# Altium PCB PCB_relay.PcbDoc
Units mm, origin at the board's own origin, x right, y up, seen from the top; angles counter-clockwise.
Board outline 35.05 x 27.18 mm, 2 copper layers (Top Layer, Bottom Layer); 11 components, 16 nets, 53 pads, 22 vias.
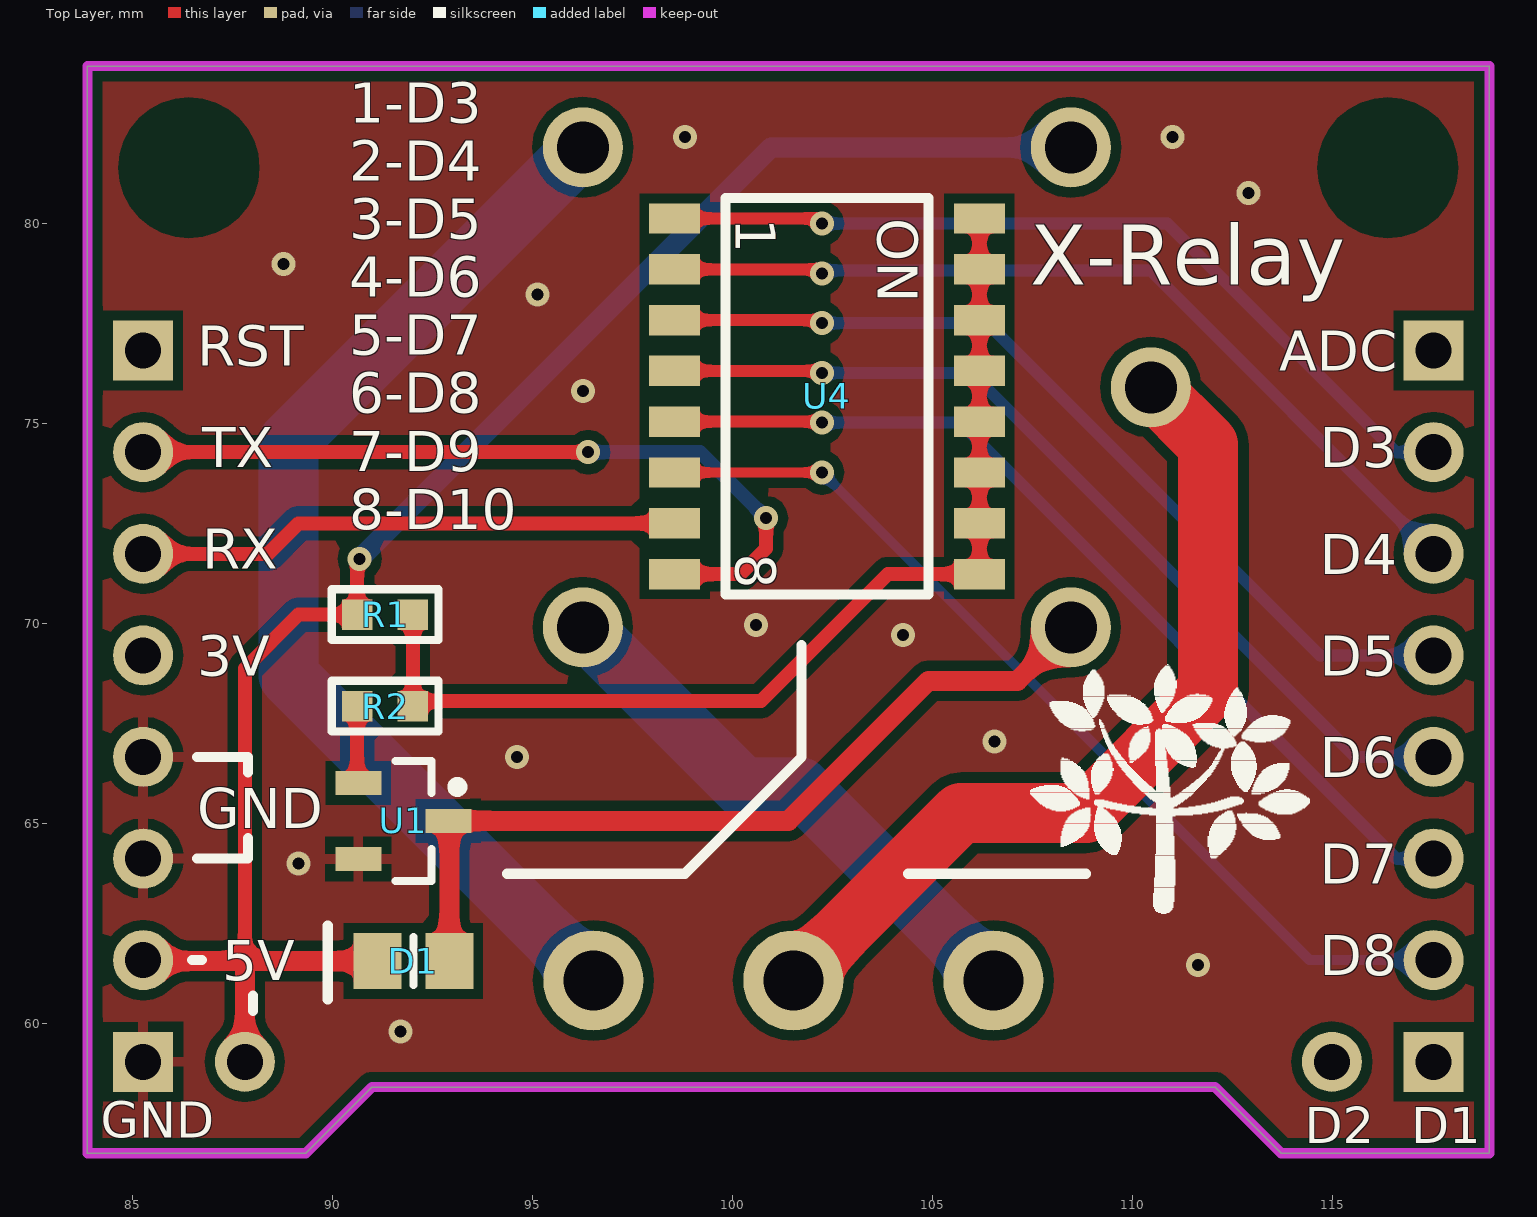
[diagram p0: Top Layer view]
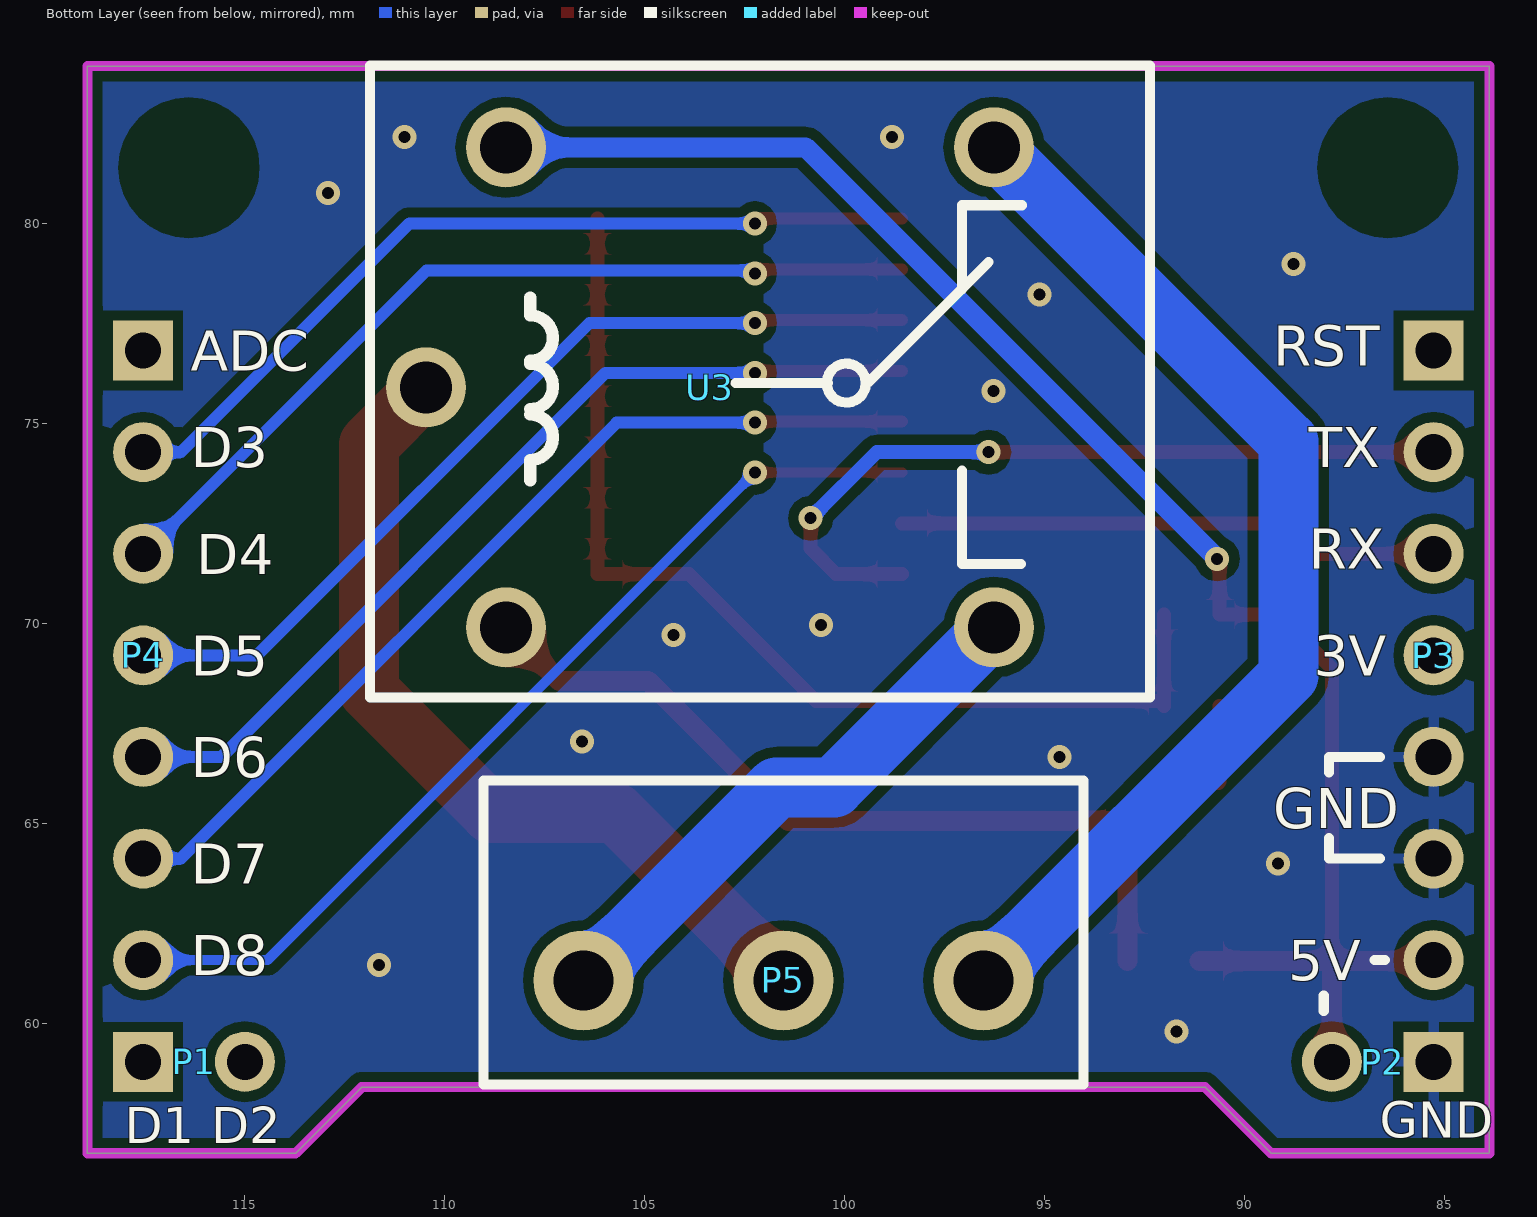
[diagram p1: Bottom Layer view, seen from below]

## Layer stack, top to bottom
Top Solder: solder mask 0.0102, Solder Resist, Dk 3.5
Top Layer: signal copper 0.0356
Dielectric 1: dielectric 0.32, FR-4, Dk 4.8
Bottom Layer: signal copper 0.0356
Bottom Solder: solder mask 0.0102, Solder Resist, Dk 3.5

## Board outline
83.871,56.769 83.871,83.947 118.923,83.947 118.923,56.769 113.716,56.769 112.065,58.42 90.983,58.42 89.332,56.769

## Design rules (kind name [scope] priority, off if disabled: settings)
Clearance [All] p1: gap=0.254
PolygonConnect PolygonConnect_VIA [IsVia] p1: connectstyle=Direct reliefconductorwidth=0.254 reliefentries=4 polygonreliefangle="90 Angle" airgapwidth=0.254
PolygonConnect [All] p2: connectstyle=Relief reliefconductorwidth=0.254 reliefentries=4 polygonreliefangle="90 Angle" airgapwidth=0.254
RoutingVias [All] p1: holewidth=0.711 width=1.27 viastyle="Through Hole" minholewidth=0.711 minwidth=1.27 maxholewidth=0.711 maxwidth=1.27
SolderMaskExpansion [All] p1: expansion=0.102
Width [All] p1: maxlimit=5 minlimit=0.254 preferedwidth=0.254
30 further rules are at their usual default settings.

## Components (designator, comment, footprint, x,y, rotation, side; value= is the part's Value field where it differs from the comment)
D1 "1N4148" 1N4148 92.837,61.595 r180 top
P1 "Header 2" HDR1X2 117.526,59.055 r180 bottom
P2 "Header 2" HDR1X2 85.268,59.055 r0 bottom
P3 "Header 7" HDR1X7 85.268,76.835 r270 bottom
P4 "Header 7" HDR1X7 117.526,76.835 r270 bottom
P5 "Connector" 3P 96.52,61.087 r0 bottom
R1 "2K" R0603 91.313,70.231 r180 top
R2 "1K" R0603 91.313,67.945 r180 top
U1 "S8050" S8050 91.694,65.151 r0 top
U3 "SRD-05VDC-SL-C" RELAY 108.458,81.915 r180 bottom
U4 "1.27mmSwitch" NUMBERSWITCH 98.552,80.137 r270 top

## Footprints (in the part's own frame and the unit in brackets; to place one, negate y for a bottom-side part, rotate by r counter-clockwise, add the part's x,y. Pads: shape width x height; smd on the part's side, far side on the other; paste and mask are expansions set on the pad)
1N4148 [mm]
  rect 1.2x1.4 smd: 1(-0.082,0.022) 2(1.718,0.022)
  silkscreen extent 0.82,-0.87 2.96,0.98, body extent -0.26,-0.68 1.89,0.72, height 0.7
3P [mm]
  round 2.5 hole 1.5: 1(0,0) 2(5,0) 3(10,0)
  silkscreen extent -2.5,-5 12.5,2.6
HDR1X2 [mm] "Connector; Header; 2 Position"
  rect 1.5x1.5 hole 0.9: 1(0,0)
  round 1.5 hole 0.9: 2(2.54,0)
HDR1X7 [mm] "Connector; Header; 7 Position"
  rect 1.5x1.5 hole 0.9: 1(0,0)
  round 1.5 hole 0.9: 2(2.54,0) 3(5.08,0) 4(7.62,0) 5(10.16,0) 6(12.7,0) 7(15.24,0)
NUMBERSWITCH [mm]
  rect 0.76x1.27 smd: 1(0,0) 2(1.27,0) 3(2.54,0) 4(3.81,0) 5(5.08,0) 6(6.35,0) 7(7.62,0) 8(8.89,0) 9(8.89,7.62) 10(7.62,7.62) 11(6.35,7.62) 12(5.08,7.62) 13(3.81,7.62) 14(2.54,7.62) 15(1.27,7.62) 16(0,7.62)
  silkscreen extent -0.51,1.27 9.4,6.35
R0603 [mil]
  rect 30x30 smd: 1(-27.5,0) 2(27.5,0)
  silkscreen extent -52,-25 52,25
RELAY [mm]
  round 2 hole 1.3: 1(0,0) 2(-2,-6) 3(0,-12) 4(12.2,0) 5(12.2,-12)
  silkscreen extent -3.4,-13.75 16.1,2.05
S8050 [mm]
  rect 1.15x0.6 smd: 1(-1.049,0.874) 2(-1.049,-1.026) 3(1.201,-0.076)
  silkscreen extent -0.12,-1.58 1.55,1.42, body extent -0.62,-1.58 0.78,1.42, height 1.1

## Part data
D1: "二极管"
P1 P2: "Header, 2-Pin"
P3 P4: "Header, 7-Pin"
P5: library part 3P, "3P端子5mm"
R1 R2: library part R0603, "贴片电阻"
U1: "三极管"
U3: library part Relay, "继电器"
U4: library part NumberSwitch, "拨码开关"

## Free pads (board coordinates)
  round 3 on Keep-Out: ""(86.411,81.407) ""(116.383,81.407)

## Via types
v1: diameter 0.6, hole 0.3, Top Layer to Bottom Layer, tented both sides, 22 vias

## Nets (pads, with @x,y where several pads share a name; then routed paths per layer and width w, separated by ;. In a path a pad name is that pad's centre, name@x,y a point inside that pad or via, vN(x,y) a via of type N, cw(c..) or ccw(c..) an arc to the next point about the centre after c; other vN are vias at no path point)
5V: D1.2 P2.2 P3.7 R1.2 U3.1 | length 42.5
  Top Layer w0.35: 87.808,61.37 87.808,61.573 87.808,68.885 89.154,70.231 R1.2 90.614,71.564 v1(90.678,71.628)
  Top Layer w0.5: P3.7 85.29,61.573 87.808,61.573 D1.2 ; P2.2 87.808,61.37
  Bottom Layer w0.5: v1(90.678,71.628) 100.965,81.915 U3.1
D3: P4.2 U4.1 | length 21.4
  Top Layer w0.3: U4.1 102.108,80.137 v1(102.235,80.01)
  Bottom Layer w0.3: v1(102.235,80.01) 110.871,80.01 116.586,74.295 P4.2
D4: P4.3 U4.2 | length 21.9
  Top Layer w0.3: U4.2 102.21,78.867 v1@102.235,78.842
  Bottom Layer w0.3: v1@102.235,78.842 110.439,78.842 P4.3
  other v1: 102.235,78.765
D5: P4.4 U4.3 | length 22.4
  Top Layer w0.3: U4.3 102.159,77.597 v1(102.235,77.521)
  Bottom Layer w0.3: v1(102.235,77.521) 106.375,77.521 114.681,69.215 P4.4
D6: P4.5 U4.4 | length 23
  Top Layer w0.3: U4.4 102.184,76.327 v1(102.235,76.276)
  Bottom Layer w0.3: v1(102.235,76.276) 105.969,76.276 115.57,66.675 P4.5
D7: P4.6 U4.5 | length 23.5
  Top Layer w0.3: U4.5 102.21,75.057 v1(102.235,75.032)
  Bottom Layer w0.3: v1(102.235,75.032) 105.689,75.032 116.586,64.135 P4.6
D8: P4.7 U4.6 | length 24
  Top Layer w0.254: U4.6 v1(102.235,73.787)
  Bottom Layer w0.254: v1(102.235,73.787) 114.427,61.595 P4.7
GND: P2.1 P3.5 P3.6 U1.2
  other v1: 91.694,59.817 111.633,61.468 89.154,64.008 94.615,66.675 106.553,67.056 104.267,69.723 100.584,69.977 96.266,75.819 95.123,78.232 88.773,78.994 112.903,80.772 98.806,82.169 110.998,82.169
NetD1_1: D1.1 U1.3 U3.3 | length 21.1
  Top Layer w0.35: U1.3 U1.3@92.919,65.051
  Top Layer w0.5: U1.3 101.397,65.075 104.902,68.58 107.123,68.58 U3.3 ; D1.1 U1.3@92.919,65.051
NetP5_1: P5.1 U3.4 | length 27
  Bottom Layer w1.5: U3.4 88.9,74.557 88.9,68.707 P5.1
NetP5_2: P5.2 U3.2 | length 21.5
  Top Layer w1.5: P5.2 105.711,65.278 108.839,65.278 111.887,68.326 111.887,74.486 U3.2
NetP5_3: P5.3 U3.5 | length 13.9
  Bottom Layer w1.5: U3.5 100.26,65.913 101.694,65.913 P5.3
NetR1_1: R1.1 R2.1 U4.9 U4.10 U4.11 U4.12 U4.13 U4.14 U4.15 U4.16 | length 26.7
  Top Layer w0.35: R2.1 R2.1@92.011,68.072 ; R1.1 R2.1@92.011,68.072 ; U4.16 U4.15 U4.14 U4.13 U4.12 U4.11 U4.10 U4.9 103.886,71.247 100.711,68.072 R2.1@92.011,68.072
NetR2_2: R2.2 U1.1 | length 2
  Top Layer w0.35: R2.2 90.614,66.056 U1.1 U1.1@90.678,66.058
RXD: P3.3 U4.7 | length 13.6
  Top Layer w0.35: P3.3 88.392,71.755 89.154,72.517 U4.7
TXD: P3.2 U4.8 | length 19.6
  Top Layer w0.35: P3.2 v1(96.393,74.295) ; U4.8 100.203,71.247 100.838,71.882 v1(100.838,72.644)
  Bottom Layer w0.35: v1(96.393,74.295) 99.187,74.295 v1(100.838,72.644)
pads on no net: P1.1 P1.2 P3.1 P3.4 P4.1

## Polygon pours and split planes (outlines as drawn)
GND on Top Layer "Top Layer-No Net" (solid, remove dead copper, pour order 26): 82.931,84.709 120.396,84.709 120.396,54.483 120.523,54.356 120.396,54.229 82.55,54.229
GND on Bottom Layer "Top Layer-No Net" (solid, remove dead copper, pour order 28): 82.931,84.836 120.142,84.836 120.65,84.328 120.523,84.201 120.523,54.991 83.566,54.991 82.931,55.626

## Keep-outs
Keep-Out Layer:
  the board outline again, w0.254

## Silkscreen, mask and mechanical layers (free items; w line width, h text height)
Top Overlay:
  drawing of 1048 lines, arcs and shapes, not listed
  text "1-D3" at 90.424,82.532 h1
  text "2-D4" at 90.424,81.08 h1
  text "3-D5" at 90.424,79.629 h1
  text "X-Relay" at 107.442,78.486 h1.5
  text "4-D6" at 90.424,78.178 h1
  text "5-D7" at 90.424,76.726 h1
  text "RST" at 86.614,76.454 h1
  text "ADC" at 113.665,76.327 h1
  text "6-D8" at 90.424,75.275 h1
  text "TX" at 86.741,73.914 h1
  text "D3" at 114.681,73.914 h1
  text "7-D9" at 90.424,73.823 h1
  text "8-D10" at 90.424,72.372 h1
  text "RX" at 86.741,71.374 h1
  text "D4" at 114.681,71.247 h1
  text "3V" at 86.614,68.707 h1
  text "D5" at 114.681,68.707 h1
  text "D6" at 114.681,66.167 h1
  text "GND" at 86.614,64.897 h1
  text "D7" at 114.681,63.5 h1
  text "D8" at 114.681,61.214 h1
  text "5V" at 87.249,61.087 h1
  text "GND" at 84.201,57.15 h0.9
  text "D2" at 114.3,57.023 h0.9
  text "D1" at 116.967,57.023 h0.9
Bottom Overlay:
  lines w0.254: 86.487,61.595 86.741,61.595 ; 86.614,64.135 87.884,64.135 87.884,64.643 ; 86.614,66.675 87.884,66.675 87.884,66.294 ; 88.011,60.325 88.011,60.706
  text "RST" at 89.281,76.454 h1
  text "ADC" at 116.332,76.327 h1
  text "TX" at 88.392,73.914 h1
  text "D3" at 116.332,73.914 h1
  text "RX" at 88.392,71.374 h1
  text "D4" at 116.205,71.247 h1
  text "3V" at 88.265,68.707 h1
  text "D5" at 116.332,68.707 h1
  text "D6" at 116.332,66.167 h1
  text "GND" at 89.281,64.897 h1
  text "D7" at 116.332,63.5 h1
  text "D8" at 116.332,61.214 h1
  text "5V" at 88.9,61.087 h1
  text "GND" at 86.614,57.15 h0.9
  text "D2" at 115.824,57.023 h0.9
  text "D1" at 117.983,57.023 h0.9

## Text inside footprints (layer, text, board x,y; h text height)
U4: Top Overlay "8" at 100.076,71.755 h1 r270; Top Overlay "1" at 100.076,80.137 h1 r270; Top Overlay "ON" at 103.632,80.137 h1 r270